# Altium PCB Controller.PcbDoc
Units mil, origin at the board's own origin, x right, y up, seen from the top; angles counter-clockwise.
Board outline 4040 x 2260 mil, 2 copper layers (Top Layer, Bottom Layer); 41 components, 48 nets, 260 pads, 26 vias.
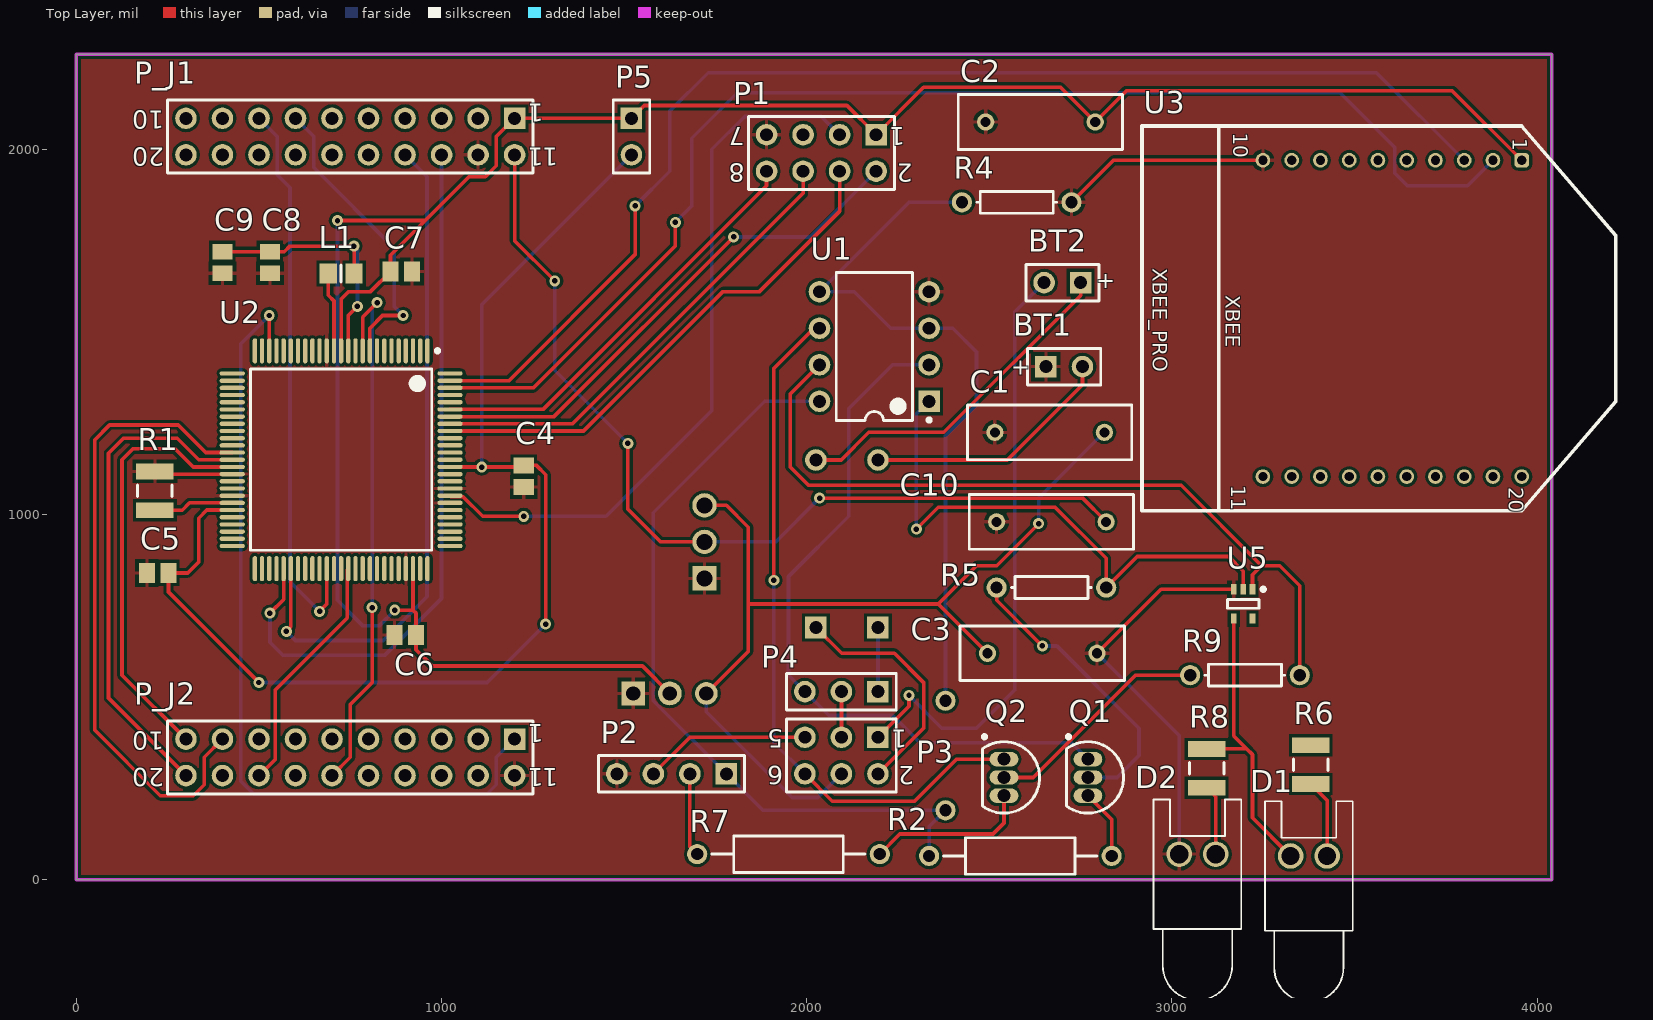
[diagram p0: Top Layer view]
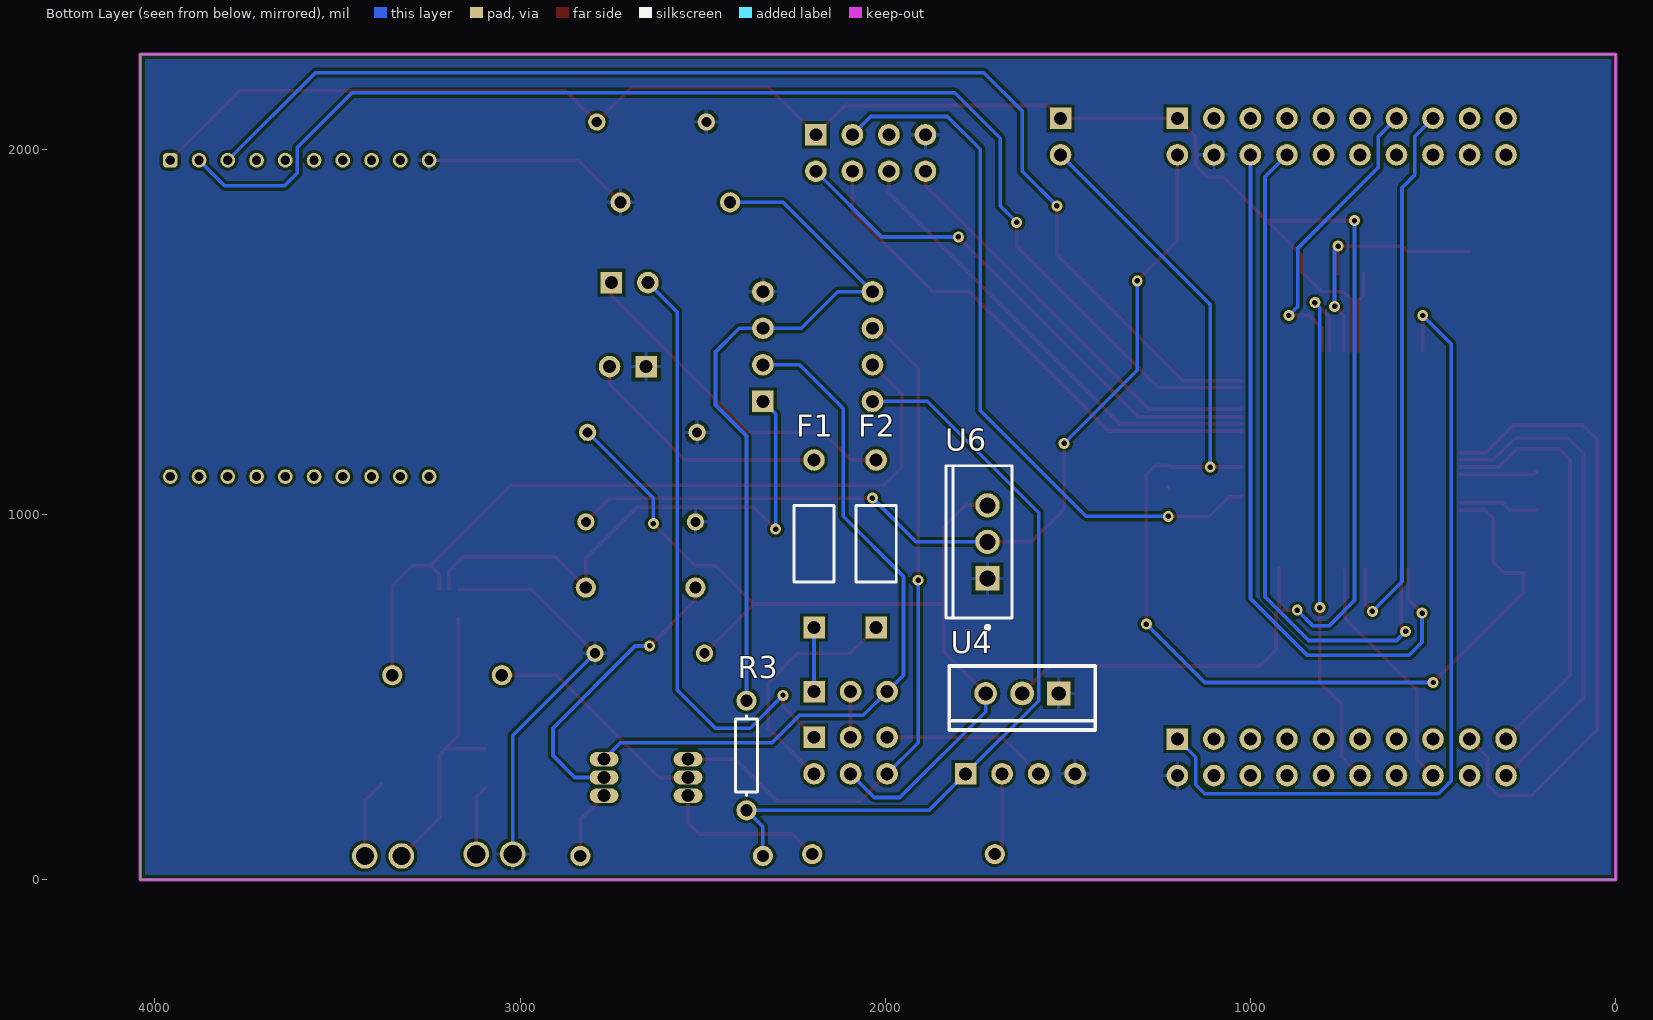
[diagram p1: Bottom Layer view, seen from below]

## Layer stack, top to bottom
Top Solder: solder mask 0.4, Solder Resist, Dk 3.5
Top Layer: signal copper 1.4
Dielectric 1: dielectric 12.6, FR-4, Dk 4.8
Bottom Layer: signal copper 1.4
Bottom Solder: solder mask 0.4, Solder Resist, Dk 3.5

## Board outline
0,0 4040,0 4040,2260 0,2260

## Design rules (kind name [scope] priority, off if disabled: settings)
Clearance [All] p1: gap=6 except(8: Arc-Poly Track-Poly SMDPad-Poly THPad-Poly Via-Poly Fill-Poly Poly-Poly)
PolygonConnect [All] p1: connectstyle=Relief reliefconductorwidth=10 reliefentries=4 polygonreliefangle="90 Angle" airgapwidth=10
RoutingVias [All] p1: holewidth=15 width=30 viastyle="Through Hole" minholewidth=15 minwidth=30 maxholewidth=28 maxwidth=50
SolderMaskExpansion [All] p1: expansion=4
Width [All] p1: maxlimit=10 minlimit=10 preferedwidth=10
30 further rules are at their usual default settings.

## Classes and differential pairs
component class "Battery Charger": BT1 BT2 D1 D2 F1 F2 P2 P3 P4 Q1 Q2 R2 R3 R4 R5 R6 R7 R8 R9 U1 U5
component class "Controller Top Sheet": C1 C2 C3 C10 U3 U6
component class MSP432: C4 C5 C6 C7 C8 C9 L1 P1 P5 P_J1 P_J2 R1 U2

## Components (designator, comment, footprint, x,y, rotation, side; value= is the part's Value field where it differs from the comment)
BT1 "Battery" BAT-2 2705,1405 r0 top
BT2 "Battery" BAT-2 2700,1635 r180 top
C1 "Cap" RAD-0.3 2665,1225 r0 top
C2 "Cap" RAD-0.3 2640,2075 r0 top
C3 "Cap" RAD-0.3 2645,620 r180 top
C4 "Cap" C0805 1225,1105 r270 top
C5 "Cap" C0805 222.52,840 r180 top
C6 "Cap" C0805 900.47,670 r180 top
C7 "C5" C0805 889.53,1665 r0 top
C8 "Cap" C0805 530,1690 r90 top
C9 "Cap" C0805 400,1690 r270 top
C10 "Cap" RAD-0.3 2670,980 r0 top
D1 "charging LED" LED-0 3375,65 r0 top
D2 "Charged LED" LED-0 3070,70 r0 top
F1 "Fuse Thermal" PIN-W2/E2.8 2195,920 r90 bottom
F2 "Fuse Thermal" PIN-W2/E2.8 2025,920 r90 bottom
L1 "LQM21PN4R7NGR" 6-0805_N 725,1660 r180 top
P1 "Header 4X2" HDR2X4 2190,2040 r180 top
P2 "Header 4" HDR1X4 1780,290 r180 top
P3 "Header 3X2" HDR2X3 2195,390 r180 top
P4 "Header 3" HDR1X3 2195,515 r180 top
P5 "Header 2" HDR1X2 1520,2085 r270 top
P_J1 "Header 10X2A" HDR2X10_CEN 1200,2085 r180 top
P_J2 "Header 10X2A" HDR2X10_CEN 1200,385 r180 top
Q1 "2N2222" TO-92A 2770,280 r180 top
Q2 "2N2222" TO-92A 2540,280 r180 top
R1 "Res3" 14-1210 215,1065 r270 top
R2 "Res Semi" AXIAL-0.5 2585,65 r180 top
R3 "Res1" AXIAL-0.3 2380,340 r90 bottom
R4 "Res1" AXIAL-0.3 2575,1855 r180 top
R5 "Res1" AXIAL-0.3 2670,800 r180 top
R6 "Res3" 14-1210 3380,315 r90 top
R7 "Res Semi" AXIAL-0.5 1950,70 r180 top
R8 "Res3" 14-1210 3095,305 r90 top
R9 "Res1" AXIAL-0.3 3200,560 r180 top
U1 "LT1632CN8" DIP-8 2185,1460 r180 top
U2 "XMS432P401RIPZR" PZ0100A_N 725,1150 r270 top
U3 "XBEE" XBEE/PRO 4390,2005 r270 top
U4 "LT1086  3.3V" TO-220 1725,510 r0 bottom
U5 "MC74VHC1G00DFT1" 419A-01_N 3195,755 r270 top
U6 "LT1086CT-5" LT-T-3 1720,925 r0 bottom

## Footprints (in the part's own frame and the unit in brackets; to place one, negate y for a bottom-side part, rotate by r counter-clockwise, add the part's x,y. Pads: shape width x height; smd on the part's side, far side on the other; paste and mask are expansions set on the pad)
6-0805_N [mm] "Chip Resistor, Body 2.0x1.2mm, IPC Medium Density"
  rect 1.2x1.4 smd: 1(-0.9,0) 2(0.9,0)
  silkscreen extent 0,-0.6 0,0.6, body extent -1.07,-0.7 1.07,0.7, height 0.7
14-1210 [mm] "Chip Resistor, Body 3.2x2.5mm, IPC High Density"
  rect 1.1x2.6 smd: 1(-1.35,0) 2(1.35,0)
  silkscreen extent -0.4,-1.2 0.4,1.2, body extent -1.68,-1.32 1.68,1.32, height 0.9
419A-01_N [mm] "SOT353, 5-Leads, Body 2x1.3mm, Pitch 0.65mm, Lead Span 2.1mm, IPC Medium Density"
  rect 0.7x0.4 smd: 1(-1.025,0.65) 2(-1.025,0) 3(-1.025,-0.65) 4(1.025,-0.65) 5(1.025,0.65)
  silkscreen extent -1.15,-1.1 0.3,1.53, body extent -0.7,-1.1 0.7,1.1, height 1.1
AXIAL-0.3 [mm] "Axial Device, Thru-Hole; 2 Leads; 0.3 in Pin Spacing"
  round 1.4 hole 0.85: 1(-3.81,0) 2(3.81,0)
  silkscreen extent -2.77,-0.76 2.77,0.76
AXIAL-0.5 [mm] "Axial Device, Thru-Hole; 2 Leads; 0.5 in Pin Spacing"
  round 1.4 hole 0.85: 1(-6.35,0) 2(6.35,0)
  silkscreen extent -5.33,-1.27 5.33,1.27
BAT-2 [mm] "Battery; 2 Leads"
  rect 1.5x1.5 hole 0.9: 1(-1.27,0)
  round 1.5 hole 0.9: 2(1.27,0)
  silkscreen extent -2.54,-1.27 2.54,1.27
C0805 [mm] "Chip Capacitor, Body 2.0x1.3mm, IPC High Density"
  rect 1.1x1.4 smd: 1(-0.75,0) 2(0.75,0)
  body extent -1.1,-0.72 1.1,0.72, height 1.4
DIP-8 [mm] "DIP; 8 Leads; Row Spacing 7.62 mm; Pitch 2.54 mm"
  rect 1.5x1.5 hole 0.9: 1(-3.81,3.81)
  round 1.5 hole 0.9: 2(-3.81,1.27) 3(-3.81,-1.27) 4(-3.81,-3.81) 5(3.81,-3.81) 6(3.81,-1.27) 7(3.81,1.27) 8(3.81,3.81)
  silkscreen extent -3.94,-5.15 2.65,5.23, body extent -3.6,-5.15 3.6,5.15, height 5.08
HDR1X2 [mm] "Connector; Header; 2 Position"
  rect 1.5x1.5 hole 0.9: 1(0,0)
  round 1.5 hole 0.9: 2(2.54,0)
  silkscreen extent -1.27,-1.27 3.81,1.27
HDR1X3 [mm] "Connector; Header; 3 Position"
  rect 1.5x1.5 hole 0.9: 1(0,0)
  round 1.5 hole 0.9: 2(2.54,0) 3(5.08,0)
  silkscreen extent -1.27,-1.27 6.35,1.27
HDR1X4 [mm] "Connector; Header; 4 Position"
  rect 1.5x1.5 hole 0.9: 1(0,0)
  round 1.5 hole 0.9: 2(2.54,0) 3(5.08,0) 4(7.62,0)
  silkscreen extent -1.27,-1.27 8.89,1.27
HDR2X3 [mm] "Connector; Header; 3x2 Position"
  rect 1.5x1.5 hole 0.9: 1(0,0)
  round 1.5 hole 0.9: 2(0,2.54) 3(2.54,0) 4(2.54,2.54) 5(5.08,0) 6(5.08,2.54)
  silkscreen extent -1.27,-1.27 6.35,3.81
HDR2X4 [mm] "Connector; Header; 4x2 Position"
  rect 1.5x1.5 hole 0.9: 1(0,0)
  round 1.5 hole 0.9: 2(0,2.54) 3(2.54,0) 4(2.54,2.54) 5(5.08,0) 6(5.08,2.54) 7(7.62,0) 8(7.62,2.54)
  silkscreen extent -1.27,-1.27 8.89,3.81
HDR2X10_CEN [mm] "Connector; Header; 10x2 Position"
  rect 1.5x1.5 hole 0.9: 1(0,0)
  round 1.5 hole 0.9: 2(2.54,0) 3(5.08,0) 4(7.62,0) 5(10.16,0) 6(12.7,0) 7(15.24,0) 8(17.78,0) 9(20.32,0) 10(22.86,0) 11(0,2.54) 12(2.54,2.54) 13(5.08,2.54) 14(7.62,2.54) 15(10.16,2.54) 16(12.7,2.54) 17(15.24,2.54) 18(17.78,2.54) 19(20.32,2.54) 20(22.86,2.54)
  silkscreen extent -1.27,-1.27 24.13,3.81
LED-0 [mil] "LED; 2 Leads"
  round 70 hole 50: 1(50,0) 2(-50,0)
  silkscreen extent -120,-400 120,150
LT-T-3 [mm]
  rect 1.7x1.7 hole 1.1: 1(0,2.54)
  round 1.7 hole 1.1: 2(0,0) 3(0,-2.54)
  silkscreen extent -1.7,-5.3 2.9,6.07, body extent -1.7,-5.28 2.9,5.28, height 22.15
PIN-W2/E2.8 [mm] "Thru-Hole; 2 Leads"
  rect 1.5x1.5 hole 0.9: 1(-5.825,0)
  round 1.5 hole 0.9: 2(5.825,0)
  silkscreen extent -2.65,-1.4 2.65,1.4
PZ0100A_N [mm]
  oval 1.75x0.3 smd paste+0 mask+0.051: 1(-7.575,6) 2(-7.575,5.5) 3(-7.575,5) 4(-7.575,4.5) 5(-7.575,4) 6(-7.575,3.5) 7(-7.575,3) 8(-7.575,2.5) 9(-7.575,2) 10(-7.575,1.5) 11(-7.575,1) 12(-7.575,0.5) 13(-7.575,0) 14(-7.575,-0.5) 15(-7.575,-1) 16(-7.575,-1.5) 17(-7.575,-2) 18(-7.575,-2.5) 19(-7.575,-3) 20(-7.575,-3.5) 21(-7.575,-4) 22(-7.575,-4.5) 23(-7.575,-5) 24(-7.575,-5.5) 25(-7.575,-6) 51(7.575,-6) 52(7.575,-5.5) 53(7.575,-5) 54(7.575,-4.5) 55(7.575,-4) 56(7.575,-3.5) 57(7.575,-3) 58(7.575,-2.5) 59(7.575,-2) 60(7.575,-1.5) 61(7.575,-1) 62(7.575,-0.5) 63(7.575,0) 64(7.575,0.5) 65(7.575,1) 66(7.575,1.5) 67(7.575,2) 68(7.575,2.5) 69(7.575,3) 70(7.575,3.5) 71(7.575,4) 72(7.575,4.5) 73(7.575,5) 74(7.575,5.5) 75(7.575,6)
  oval 0.3x1.75 smd paste+0 mask+0.051: 26(-6,-7.575) 27(-5.5,-7.575) 28(-5,-7.575) 29(-4.5,-7.575) 30(-4,-7.575) 31(-3.5,-7.575) 32(-3,-7.575) 33(-2.5,-7.575) 34(-2,-7.575) 35(-1.5,-7.575) 36(-1,-7.575) 37(-0.5,-7.575) 38(0,-7.575) 39(0.5,-7.575) 40(1,-7.575) 41(1.5,-7.575) 42(2,-7.575) 43(2.5,-7.575) 44(3,-7.575) 45(3.5,-7.575) 46(4,-7.575) 47(4.5,-7.575) 48(5,-7.575) 49(5.5,-7.575) 50(6,-7.575) 76(6,7.575) 77(5.5,7.575) 78(5,7.575) 79(4.5,7.575) 80(4,7.575) 81(3.5,7.575) 82(3,7.575) 83(2.5,7.575) 84(2,7.575) 85(1.5,7.575) 86(1,7.575) 87(0.5,7.575) 88(0,7.575) 89(-0.5,7.575) 90(-1,7.575) 91(-1.5,7.575) 92(-2,7.575) 93(-2.5,7.575) 94(-3,7.575) 95(-3.5,7.575) 96(-4,7.575) 97(-4.5,7.575) 98(-5,7.575) 99(-5.5,7.575) 100(-6,7.575)
  silkscreen extent -7.7,-6.3 6.3,6.83, body extent 0,0 0.25,0.25, height 0.25
RAD-0.3 [mm] "Radial Cap, Thru-Hole; 2 Leads; 0.3 in Pin Spacing"
  round 1.2 hole 0.7: 1(-3.81,0) 2(3.81,0)
  silkscreen extent -5.71,-1.91 5.71,1.91
TO-92A [mm] "TO, Flat Index; 3 In-Line, Axial Leads; Body Dia. 4.5mm; Leads 0.51 x 0.48 mm (max)"
  oval 2x1 hole 0.9: 1(0,-1.27) 2(0,0) 3(0,1.27)
  silkscreen extent -2.48,-2.95 1.5,2.48, body extent -2.48,-2.5 1.5,2.5, height 6.86
TO-220 [mil]
  rect 65x65 hole 39.4: 1(-200,0)
  round 65 hole 39.4: 2(-100,0)
  round 62 hole 39.4: 3(0,0)
  silkscreen extent -300,-75 100,100
XBEE/PRO [mil]
  rrect50% 40x40 hole 25: 1(35,-432.09)
  round 40 hole 25: 2(35,-510.83) 3(35,-589.57) 4(35,-668.31) 5(35,-747.05) 6(35,-825.79) 7(35,-904.53) 8(35,-983.27) 9(35,-1062.01) 10(35,-1140.75) 11(901.14,-1140.75) 12(901.14,-1062.01) 13(901.14,-983.27) 14(901.14,-904.53) 15(901.14,-825.79) 16(901.14,-747.05) 17(901.14,-668.31) 18(901.14,-589.57) 19(901.14,-510.83) 20(901.14,-432.09)
  silkscreen extent -59,-1472 995,-175

## Part data
BT1 BT2: "Multicell Battery"
C1 C2 C3 C10: "Capacitor"
C4 C5 C6 C7: library part "Cap Pol3", "Polarized Capacitor (Surface Mount)"
C8 C9: library part "Cap Semi", "Capacitor (Semiconductor SIM Model)"
D1 D2: library part LED0, "Typical INFRARED GaAs LED"
F1 F2: "Thermal Fuse"
L1: library part Inductor, "Inductor"
P1: "Header, 4-Pin, Dual row"
P2: "Header, 4-Pin"
P3: "Header, 3-Pin, Dual row"
P4: "Header, 3-Pin"
P5: "Header, 2-Pin"
P_J1 P_J2: "Header, 10-Pin, Dual row"
Q1 Q2: library part 2N3904, "NPN General Purpose Amplifier"
R1 R3 R4 R5 R6 R8 R9: "Resistor"
R2 R7: "Semiconductor Resistor"
U1: "45MHz, 45V/µs, Dual Rail-to-Rail Input and Output Precision Operational Amplifier"
U2: "Imported"
U5: "2-Input NAND Gate"
U6: "1.5 A Low Dropout Positive Regulator, 2.55 to 25 V Vin, 5 V Vout, 3-pin FM (T-3), 0 to 150 degC"

## Via types
v1: diameter 30, hole 15, Top Layer to Bottom Layer, 26 vias

## Nets (pads, with @x,y where several pads share a name; then routed paths per layer and width w, separated by ;. In a path a pad name is that pad's centre, name@x,y a point inside that pad or via, vN(x,y) a via of type N, cw(c..) or ccw(c..) an arc to the next point about the centre after c; other vN are vias at no path point)
3V3: C2.2 C6.1 C7.1 P1.1 P5.1 P_J1.1 U2.13 U2.73 U3.1 U4.2 | length 6411.3
  Top Layer w10: v1(715,1805) 955,1805 ; U2.13 725,1590 745.47,1610.47 805.47,1610.47 C7.1 860,1710 955,1805 ; v1(871.85,738.15) 921.85,738.15 ; U2.73 921.85,738.15 ; U4.2 1550,585 975,585 930,630 C6.1 930,730 921.85,738.15 ; U3.1 3767.91,2160 2875,2160 C2.2 2695,2170 2320,2170 P1.1 2110,2120 1555,2120 P5.1 P_J1.1 1150,2035 1150,1955 1120,1925 1075,1925 955,1805
  Bottom Layer w10: v1(715,1805) 715,765 785,695 828.7,695 v1(871.85,738.15)
5V: C10.2 P_J1.11 U6.2 | length 2522.3
  Top Layer w10: P_J1.11 1200,1750 v1(1310,1640) ; v1(1510,1195) 1510,1015 1600,925 U6.2 ; v1(2035,1045) 2755,1045 C10.2
  Bottom Layer w10: v1(1310,1640) 1310,1395 v1(1510,1195) ; U6.2 1915,925 v1(2035,1045)
BAT1_CHG: P4.3 Q1.1 U1.2 | length 1983.3
  Bottom Layer w10: U1.2 2235,1410 2115,1290 2115,995 1950,830 1950,560 P4.3 2060,450 2235,450 2310,375 2725,375 Q1.1
BAT1_POS: F1.1 P4.1 | length 175.7
  Bottom Layer w10: P4.1 F1.1
BAT1_STATUS: R5.1 U1.1 U5.2 | length 1523.8
  Top Layer w10: v1(2300,960) 2360,1020 2680,1020 2820,880 R5.1 2905,885 3155,885 3195,845 U5.2
  Bottom Layer w10: v1(2300,960) 2300,1275 U1.1
BAT2_CHG: P3.6 Q2.1 U1.6 | length 1939.5
  Top Layer w10: v1(1910,820) 1910,1400 2020,1510 U1.6 ; P3.6 2070,215 2295,215 2410,330 Q2.1
  Bottom Layer w10: v1(1910,820) 1910,375 P3.6
BAT2_NEG: BT2.2 P3.1 | length 1669.1
  Top Layer w10: P3.1 2280,475 v1(2280,505)
  Bottom Layer w10: v1(2280,505) 2370,415 2465,415 2570,520 2570,1555 BT2.2
BAT2_POS: F2.1 P3.2 | length 659.2
  Top Layer w10: F2.1 2095.67,620 2240,620 2320,540 2320,415 P3.2
BAT2_STATUS: R9.1 U1.7 U5.1 | length 2162.8
  Top Layer w10: U1.7 1955,1330 1955,1130 2005,1080 3025.59,1080 3245.59,860 ; U5.1 3220.59,835 3245.59,860 ; R9.1 3350,805 3295,860 3245.59,860
CHG2_GND: P2.3 P3.5 | length 456.4
  Top Layer w10: P2.3 1680,390 P3.5
GND: BT1.1 C1.1 C2.1 C3.1 C4.2 C5.2 C6.2 C7.2 C8.1 C9.2 C10.1 D2.2 P1.7 P2.4 P_J1.12 P_J2.11 R1.1 R4.1 U1.4 U2.15 U2.40 U2.43 U2.72 U2.82 U2.84 U3.10 U4.1 U5.3 U6.1 | length 1878.4
  Top Layer w10: R1.1 222.52,1110.63 U2.40 ; C4.2@1225,1074.04 C4.2 ; R4.1 2840,1970 U3.10 ; C3.1 2970.35,795.35 U5.3
  Bottom Layer w10: C3.1 3020,395 D2.2
LCD_RST: P_J2.9 U2.37 | length 1751.7
  Top Layer w10: P_J2.9 350,335 350,260 320,230 230,230 50,410 50,1204.06 90.94,1245 278.74,1245 354.06,1169.68 U2.37
LCD_SCL: P_J1.7 U2.9 | length 829.9
  Top Layer w10: U2.9 803.74,1510.31 838.43,1545 v1(895,1545)
  Bottom Layer w10: P_J1.7 650,2035 650,1950 870,1730 870,1570 v1(895,1545)
LCD_SCS: P_J2.18 U2.64 | length 668.1
  Top Layer w10: P_J2.18 545,330 545,520 741.91,716.91 741.91,848.99 U2.64
LCD_SDC: P_J1.8 U2.61 | length 1543.7
  Top Layer w10: v1(665.94,735) 685.63,754.69 U2.61
  Bottom Layer w10: P_J1.8 550,2035 550,1930 585,1895 585,815.94 v1(665.94,735)
LCD_SDI: P_J2.16 U2.10 | length 1494.2
  Top Layer w10: P_J2.16 750,335 750,480 810,540 v1(810,745) ; U2.10 784.06,1540.63 v1(823.43,1580)
  Bottom Layer w10: v1(810,745) 810,1566.57 v1(823.43,1580)
LDO_IN: C1.2 C3.2 P3.4 U4.3 U6.3 | length 2593.4
  Top Layer w10: U6.3 1780,1025 1840,965 1840,755 ; U4.3 1840,625 1840,755 ; C3.2 2360,755 ; v1(2635,975) 2520,860 2465,860 2360,755 ; 1840,755 2360,755
  Bottom Layer w10: U4.3 1725,460 1960,225 2030,225 P3.4 ; v1(2635,975) 2635,1045 C1.2
LED_PWM: P_J2.1 U2.23 | length 2274.7
  Top Layer w10: U2.23 v1(528.15,1545)
  Bottom Layer w10: v1(528.15,1545) 450,1466.85 450,270 485,235 1125,235 1150,260 1150,335 P_J2.1
LED_STATUS: D1.2 R8.2 U5.4 | length 824.1
  Top Layer w10: R8.2 3205,358.15 ; U5.4 3169.41,393.74 3205,358.15 ; D1.2 3220.59,169.41 3220.59,342.56 3205,358.15
MSP_AVCC: C4.1 C5.1 P5.2 U2.45 U2.87 | length 3278.9
  Top Layer w10: U2.45 357.2,1012.2 335,990 335,870 305,840 C5.1 252.05,787.95 v1(500,540) ; U2.87 1220.79,1130.31 C4.1 1260,1134.53 1285.47,1109.06 1285.47,700.47 v1(1285,700)
  Bottom Layer w10: v1(500,540) 1125,540 v1(1285,700) ; v1(1110,1130) 1110,1575 P5.2
NetBT1_2: BT1.2 F1.2 | length 695.2
  Top Layer w10: F1.2 2549.33,1149.33 2755,1355 BT1.2
NetBT2_1: BT2.1 F2.2 | length 946.7
  Top Layer w10: F2.2 2094.33,1149.33 2170,1225 2375,1225 2750,1600 BT2.1
NetD1_1: D1.1 R6.1 | length 215.5
  Top Layer w10: R6.1 3425,216.85 D1.1
NetD2_1: D2.1 R8.1 | length 192.2
  Top Layer w10: R8.1 3120,226.85 D2.1
NetP3_3: P3.3 P4.2 | length 125
  Top Layer w10: P3.3 P4.2
NetQ1_2: Q1.2 R5.2 | length 809.8
  Top Layer w10: R5.2 2520,765 v1(2645,640)
  Bottom Layer w10: v1(2645,640) 2685,640 2910,415 2910,340 2850,280 Q1.2
NetQ1_3: Q1.3 R2.1 | length 191.9
  Top Layer w10: Q1.3 2835,165 R2.1
NetQ2_2: Q2.2 R9.2 | length 626
  Top Layer w10: Q2.2 2620,280 2900,560 R9.2
NetQ2_3: Q2.3 R7.1 | length 450.2
  Top Layer w10: R7.1 2255,125 2510,125 2540,155 Q2.3
NetR1_2: R1.2 U2.44 | length 220.1
  Top Layer w10: R1.2 290,1011.85 310.04,1031.89 U2.44
QI1_VCC: R6.2
QI_1_VCC: P2.1 R2.2 R3.1 U1.8 | length 2164.2
  Bottom Layer w10: U1.8 1885,1310 1580,1005 1580,490 P2.1 1880,190 R3.1 2335,145 R2.2
QI_2_VCC: P2.2 R7.2 | length 228.3
  Top Layer w10: P2.2 1680,90 R7.2
TCK_MSP: P1.8 U2.95 | length 1160.4
  Top Layer w10: U2.95 1277.8,1287.8 1890,1900 P1.8
TDI_MSP: P1.4 U2.92 | length 1425.8
  Top Layer w10: U2.92 1388.74,1228.74 1770.47,1610.47 1870.47,1610.47 2090,1830 P1.4
TDO_MSP: P1.6 U2.93 | length 1288.4
  Top Layer w10: U2.93 1358.43,1248.43 1990,1880 P1.6
TMS_MSP: P1.2 U2.94 | length 1445.1
  Top Layer w10: U2.94 1308.11,1268.11 v1(1800,1760)
  Bottom Layer w10: v1(1800,1760) 2010,1760 P1.2
TOUCH_XN: P_J2.10 U2.39 | length 1172.3
  Top Layer w10: P_J2.10 125,560 125,1150 155,1180 270,1180 319.69,1130.31 U2.39
TOUCH_XP: P_J1.14 U2.56 | length 1856.7
  Top Layer w10: v1(575,680) 587.2,692.2 U2.56
  Bottom Layer w10: v1(575,680) 600,655 840,655 960,775 960,1925 P_J1.14
TOUCH_YN: P_J2.20 U2.38 | length 1351.3
  Top Layer w10: P_J2.20 87.75,497.25 87.75,1167.75 129.06,1209.06 275.94,1209.06 335,1150 U2.38
TOUCH_YP: P_J1.13 U2.55 | length 1981
  Top Layer w10: v1(530,730) 567.52,767.52 U2.55
  Bottom Layer w10: v1(530,730) 530,650 565,615 845,615 1000,770 P_J1.13
TRST_MSP: P1.3 U2.83 | length 1983.3
  Top Layer w10: U2.83 1026.01,1048.8 1058.77,1048.8 1112.57,995 v1(1225,995)
  Bottom Layer w10: v1(1225,995) 1450,995 1740,1285 1740,2000 1830,2090 2040,2090 P1.3
UART_XBEE_MSP_IN: U2.98 U3.2 | length 3512.8
  Top Layer w10: U2.98 1251.85,1346.85 1640,1735 v1(1640,1800)
  Bottom Layer w10: v1(1640,1800) 1685,1845 1685,2030 1810,2155 3460,2155 3610,2005 3610,1935 3645,1900 3809.17,1900 U3.2
UART_XBEE_MSP_OUT: U2.99 U3.3 | length 3400.6
  Top Layer w10: U2.99 1184.65,1366.54 1530,1711.89 v1(1530,1845)
  Bottom Layer w10: v1(1530,1845) 1625,1940 1625,2105 1730,2210 3560.43,2210 U3.3
VCORE: C8.2 C9.1 L1.1 U2.12 | length 742.7
  Top Layer w10: C9.1 C8.2 569.53,1719.53 585,1735 v1(760,1735) 760.43,1734.57 L1.1 ; U2.12 744.68,1545 v1(769.68,1570)
  Bottom Layer w10: v1(760,1735) 769.68,1725.32 v1(769.68,1570)
VDD: U5.5
VREF: R3.2 R4.2 U1.3 U1.5 | length 1980
  Bottom Layer w10: R3.2 2380,1215 2465,1300 2465,1445 2400,1510 U1.3 2230,1510 2130,1610 U1.5 2280,1855 R4.2
VSW: L1.2 U2.14 | length 218.3
  Top Layer w10: L1.2 689.57,1600.43 705.31,1584.69 U2.14
pads on no net: P1.5 P_J1.2 P_J1.3 P_J1.4 P_J1.5 P_J1.6 P_J1.9 P_J1.10 P_J1.15 P_J1.16 P_J1.17 P_J1.18 P_J1.19 P_J1.20 P_J2.2 P_J2.3 P_J2.4 P_J2.5 P_J2.6 P_J2.7 P_J2.8 P_J2.12 P_J2.13 P_J2.14 P_J2.15 P_J2.17 P_J2.19 U2.1 U2.2 U2.3 U2.4 U2.5 U2.6 U2.7 U2.8 U2.11 U2.16 U2.17 U2.18 U2.19 U2.20 U2.21 U2.22 U2.24 U2.25 U2.26 U2.27 U2.28 U2.29 U2.30 U2.31 U2.32 U2.33 U2.34 U2.35 U2.36 U2.41 U2.42 U2.46 U2.47 U2.48 U2.49 U2.50 U2.51 U2.52 U2.53 U2.54 U2.57 U2.58 U2.59 U2.60 U2.62 U2.63 U2.65 U2.66 U2.67 U2.68 U2.69 U2.70 U2.71 U2.74 U2.75 U2.76 U2.77 U2.78 U2.79 U2.80 U2.81 U2.85 U2.86 U2.88 U2.89 U2.90 U2.91 U2.96 U2.97 U2.100 U3.4 U3.5 U3.6 U3.7 U3.8 U3.9 U3.11 U3.12 U3.13 U3.14 U3.15 U3.16 U3.17 U3.18 U3.19 U3.20

## Polygon pours and split planes (outlines as drawn)
GND on Top Layer "Top Layer-GND" (solid, pour order 4): 0,0 0,2260 4040,2260 4040,0
GND on Bottom Layer "GND_L02_P006" (solid, pour order 6): 0,0 0,2260 4040,2260 4040,0

## Keep-outs
Keep-Out Layer:
  lines w10: 0,0 0,50 0,135 0,2260 2975,2260 4040,2260 4040,0 0,0

## Text inside footprints (layer, text, board x,y; h text height)
BT1: Top Overlay "+" at 2560.51,1382.28 h45.28
BT2: Top Overlay "+" at 2844.49,1657.72 h45.28 r180
P1: Top Overlay "8" at 1830,1960 h50 r180; Top Overlay "7" at 1830,2060 h50 r180; Top Overlay "1" at 2270,2060 h50 r180; Top Overlay "2" at 2290,1960 h50 r180
P3: Top Overlay "1" at 2275,410 h50 r180; Top Overlay "2" at 2295,310 h50 r180; Top Overlay "5" at 1935,410 h50 r180; Top Overlay "6" at 1935,310 h50 r180
P_J1: Top Overlay "1" at 1280,2125 h50 r180; Top Overlay "1" at 1320,2005 h50 r180; Top Overlay "1" at 1280,2005 h50 r180; Top Overlay "10" at 240,2105 h50 r180; Top Overlay "20" at 240,2005 h50 r180
P_J2: Top Overlay "1" at 1280,425 h50 r180; Top Overlay "1" at 1320,305 h50 r180; Top Overlay "1" at 1280,305 h50 r180; Top Overlay "10" at 240,405 h50 r180; Top Overlay "20" at 240,305 h50 r180
U3: Top Overlay "20" at 3922.91,1075 h40 r270; Top Overlay "11" at 3162.91,1080 h40 r270; Top Overlay "10" at 3167.91,2045 h40 r270; Top Overlay "1" at 3932.91,2030 h40 r270; Top Overlay "XBEE_PRO" at 2947.91,1675 h40 r270